# Altium PCB DE-120418.PcbDoc
Units mil, origin at the board's own origin, x right, y up, seen from the top; angles counter-clockwise.
Board outline 690 x 830 mil, 2 copper layers (Top Layer, Bottom Layer); 23 components, 19 nets, 85 pads, 27 vias.
Unrouted connection lines stored in the file: 1.
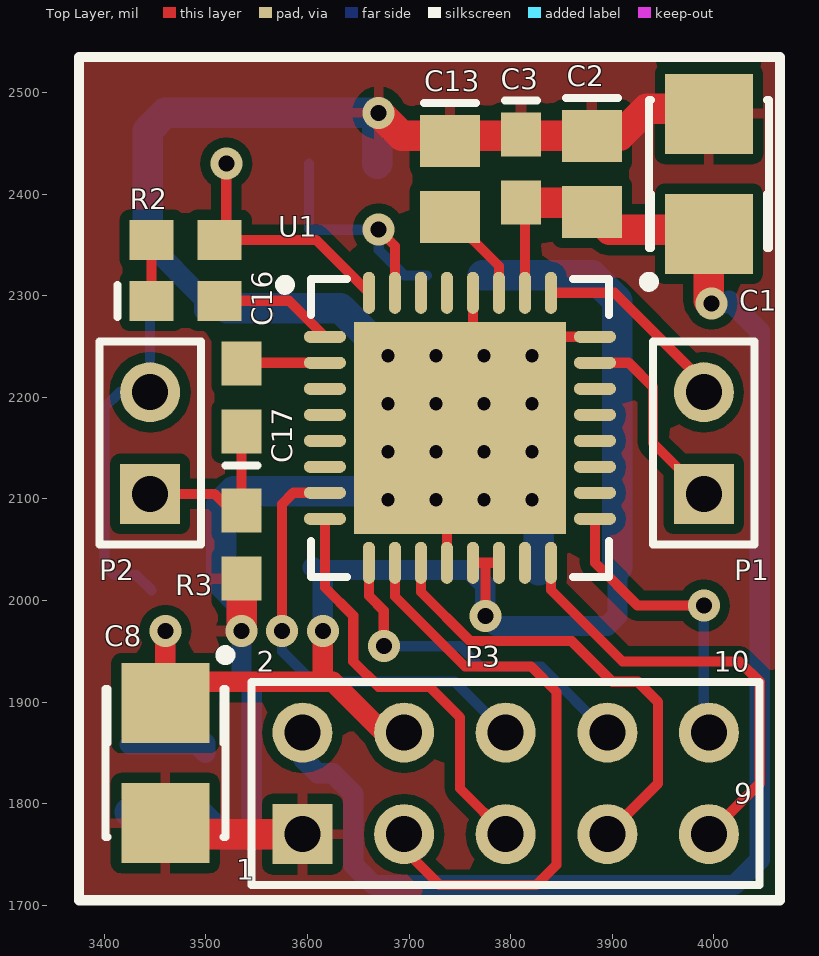
[diagram p0: Top Layer view]
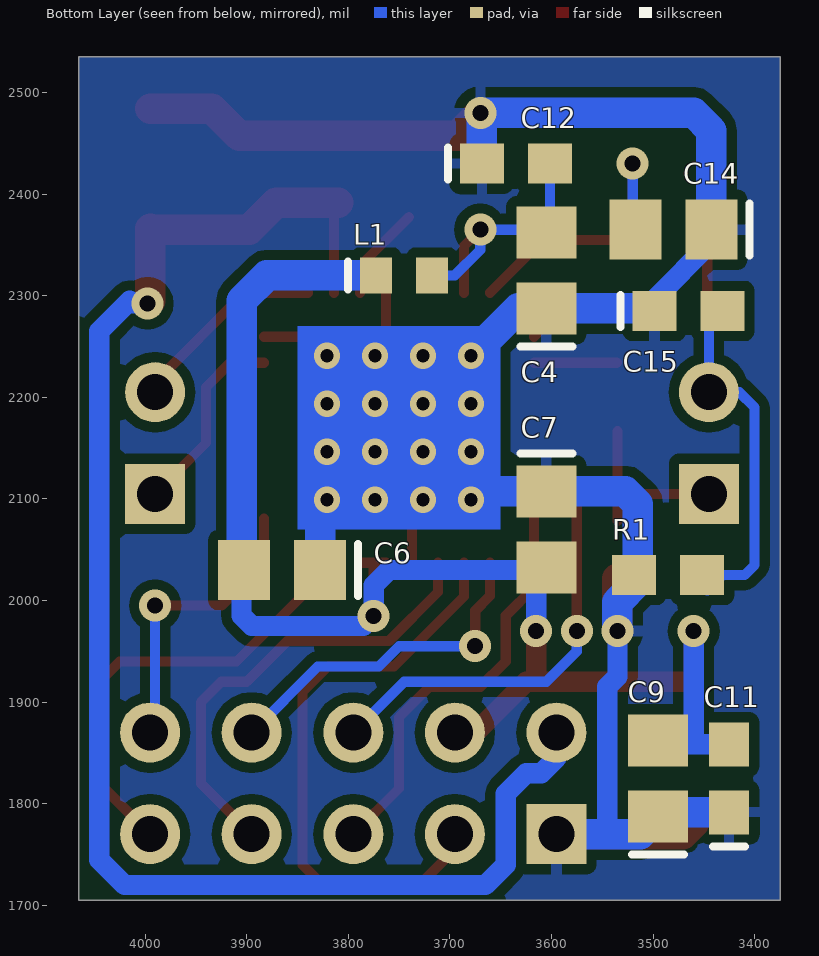
[diagram p1: Bottom Layer view, seen from below]

## Layer stack, top to bottom
Top Solder: solder mask 0.4, Solder Resist, Dk 3.5
Top Layer: signal copper 1.4
Dielectric 1: dielectric 12.6, FR-4, Dk 4.8
Bottom Layer: signal copper 1.4
Bottom Solder: solder mask 0.4, Solder Resist, Dk 3.5

## Board outline
3375,1705 3375,2535 4065,2535 4065,1705

## Design rules (kind name [scope] priority, off if disabled: settings)
Clearance [All] p1: gap=0 except(10: Arc-Fill Arc-Poly Track-Fill Track-Poly SMDPad-Fill SMDPad-Poly THPad-Fill THPad-Poly Via-Fill Via-Poly Fill-Fill Fill-Poly Poly-Poly)
PolygonConnect [All] p1: connectstyle=Relief reliefconductorwidth=10 reliefentries=4 polygonreliefangle="90 Angle" airgapwidth=10
RoutingVias [All] p1: holewidth=15.75 width=31.5 viastyle="Through Hole" minholewidth=5 minwidth=10 maxholewidth=50 maxwidth=100
SolderMaskExpansion [All] p1: expansion=4
Width [All] p1: maxlimit=200 minlimit=10 preferedwidth=30
30 further rules are at their usual default settings.

## Components (designator, comment, footprint, x,y, rotation, side; value= is the part's Value field where it differs from the comment)
C1 "47uF/10V" 3528 3995,2420 r90 top
C2 "10uF" 0805 3880,2420 r270 top
C3 "100nF" 0603 3810,2425 r270 top
C4 "4u7" 0805 3605,2325 r90 bottom
C6 "4u7" 0805 3865,2030 r0 bottom
C7 "4u7" 0805 3605,2070 r270 bottom
C8 "100uF" 3528 3460,1840 r270 top
C9 "10uF" 0805 3495,1825 r90 bottom
C11 "100nF" 0603 3425,1825 r90 bottom
C12 "100nF" 0603 3635,2430 r180 bottom
C13 "4u7" 0805 3740,2415 r270 top
C14 "4u7" 0805 3480,2365 r0 bottom
C15 "220pF" 0603 3465,2285 r180 bottom
C16 "1uF" 0603 3480,2295 r0 top
C17 "1uF" 0603 3535,2200 r90 top
L1 "BLM15AG121" INDC1608L 3745,2320 r180 bottom
P1 "SPEAKER" HDR1X2 3990,2105 r90 top
P2 "MIC" HDR1X2 3445,2105 r90 top
P3 "AUDIO_CODEC" HDR2X5 3595,1770 r0 top
R1 "47K" ERA-0603 3485,2025 r0 bottom
R2 "680R" ERA-0603 3480,2355 r180 top
R3 "0R" ERA-0603 3535,2055 r90 top
U1 "WM8976" QFN32_N 3750,2170 r0 top

## Footprints (in the part's own frame and the unit in brackets; to place one, negate y for a bottom-side part, rotate by r counter-clockwise, add the part's x,y. Pads: shape width x height; smd on the part's side, far side on the other; paste and mask are expansions set on the pad)
0603 [mm] "Chip Capacitor; Body 1.6 x 0.8 mm (LxW typ)"
  rect 1.1x1 smd: 1(-0.85,0) 2(0.85,0)
  silkscreen extent -1.7,-0.4 -1.7,0.4, body extent -1.8,-0.6 1.5,0.6, height 0.87
0805 [mm] "Chip Capacitor; Body 2.0 x 1.2 mm (LxW typ)"
  rect 1.3x1.5 smd: 1(-0.95,0) 2(0.95,0)
  silkscreen extent -1.9,-0.65 -1.9,0.65
3528 [mm] "Capacitor, SM Tantalum; Body 3.5 x 2.8 mm (LxW typ)"
  rect 2x2.2 smd: 1(-1.5,0) 2(1.5,0)
  silkscreen extent -2.82,-1.5 1.85,1.62
ERA-0603 [mm] "Chip Resistor; Body 1.6 x 0.8 mm (LxW typ)"
  rect 1.1x1 smd: 1(-0.85,0) 2(0.85,0)
HDR1X2 [mm] "Connector; Header; 2 Position"
  rect 1.5x1.5 hole 0.9: 1(0,0)
  round 1.5 hole 0.9: 2(2.54,0)
  silkscreen extent -1.27,-1.27 3.81,1.27
HDR2X5 [mm] "Connector; Header; 5x2 Position"
  rect 1.5x1.5 hole 0.9: 1(0,0)
  round 1.5 hole 0.9: 2(0,2.54) 3(2.54,0) 4(2.54,2.54) 5(5.08,0) 6(5.08,2.54) 7(7.62,0) 8(7.62,2.54) 9(10.16,0) 10(10.16,2.54)
  silkscreen extent -1.27,-1.27 11.43,3.81
INDC1608L [mm] "Chip Inductor, Body 1.6x0.8mm, IPC High Density"
  rect 0.8x0.9 smd: 1(-0.7,0) 2(0.7,0)
  silkscreen extent -1.4,-0.35 -1.4,0.35, body extent -0.87,-0.48 0.87,0.48, height 0.55
QFN32_N [mm] "QFN, 32-Leads, Body 7x7 mm, Pitch 0.65mm, IPC Medium Density"
  oval 1.05x0.3 smd: 1(-3.375,2.275) 2(-3.375,1.625) 3(-3.375,0.975) 4(-3.375,0.325) 5(-3.375,-0.325) 6(-3.375,-0.975) 7(-3.375,-1.625) 8(-3.375,-2.275) 17(3.375,-2.275) 18(3.375,-1.625) 19(3.375,-0.975) 20(3.375,-0.325) 21(3.375,0.325) 22(3.375,0.975) 23(3.375,1.625) 24(3.375,2.275)
  oval 0.3x1.05 smd: 9(-2.275,-3.375) 10(-1.625,-3.375) 11(-0.975,-3.375) 12(-0.325,-3.375) 13(0.325,-3.375) 14(0.975,-3.375) 15(1.625,-3.375) 16(2.275,-3.375) 25(2.275,3.375) 26(1.625,3.375) 27(0.975,3.375) 28(0.325,3.375) 29(-0.325,3.375) 30(-0.975,3.375) 31(-1.625,3.375) 32(-2.275,3.375)
  rect 5.3x5.3 smd: 33(0,0)
  silkscreen extent -4.5,-3.72 3.72,3.72, body extent -3.57,-3.57 3.57,3.57, height 1

## Part data
C1 C8: library part 293D156X0004B2, "Tantamount Commercial, Surface Mount Solid Tantalum Chip Capacitor: 15uF, 20% Tolerance, 4 WVDC @ +85°C, Surge = 5.2V"
C2 C4 C6 C7 C9 C13 C14: library part C0805, "Ceramic Chip Capacitor - Standard"
C3 C11 C12 C15 C16 C17: library part C0603, "Ceramic Chip Capacitor - Standard"
L1: library part Inductor_SMD, "Inductor"
P1 P2: library part "Header 2", "Header, 2-Pin"
P3: library part "Header 5X2", "Header, 5-Pin, Dual row"
R1 R2 R3: library part ERAV, "Metal Film Thermosensitive Chip Resistor, 0.56 Ohm to 10k Ohm Range, 5% Tolerance, 0603 Size, 0.063 W"
U1: "Stereo CODEC with speaker driver"

## Via types
v1: diameter 25.98, hole 12.99, Top Layer to Bottom Layer, tented top, 16 vias
v2: diameter 31.5, hole 15.75, Top Layer to Bottom Layer, 11 vias

## Nets (pads, with @x,y where several pads share a name; then routed paths per layer and width w, separated by ;. In a path a pad name is that pad's centre, name@x,y a point inside that pad or via, vN(x,y) a via of type N, cw(c..) or ccw(c..) an arc to the next point about the centre after c; other vN are vias at no path point)
+3V3: C6.2 C7.2 C8.1 C9.2 C11.2 L1.1 P3.4 U1.13 U1.14 | length 1513.9
  Top Layer w10: U1.13 3775.59,2037.13 ; v2(3775,1985) 3775,2036.54 3775.59,2037.13 ; U1.14 3775.59,2037.13
  Top Layer w20: v2(3460,1970) 3460,1920 3615,1920 ; v2(3615,1970) 3615,1920 ; P3.4 3675,1870 3625,1920 3615,1920
  Bottom Layer w20: C11.2 3455,1858.46 ; v2(3460,1970) 3460,1863.46 3455,1858.46 ; C9.2@3491.06,1871.06 C9.2@3491.06,1858.46 ; C9.2@3499.53,1859.53 3499.53,1850 C9.2@3491.06,1858.46 ; C7.2 C7.2@3615,2022.6 ; v2(3615,1970) 3615,2030 3760,2030 3775,2015 v2(3775,1985) 3785,1975 3895,1975 3905,1985 C6.2@3905,2032.6 ; P3.4@3690,1870 P3.4 ; 3455,1858.46 C9.2@3491.06,1858.46
  Bottom Layer w30: L1.1 3880,2320 3905,2295 C6.2@3905,2032.6
+5V: C1.1 C2.2 C3.2 P3.2 U1.26 | length 1527
  Top Layer w10: C3.2 3813.98,2387.56 U1.26
  Top Layer w30: C3.2 3871.06,2391.54 C2.2 3897.6,2365 3990,2365 C1.1@3995,2360 ; C1.1@3995,2365.94 C1.1@3995,2360 ; v2(3997.5,2292.5) 3995,2295 C1.1@3995,2360
  Bottom Layer w20: P3.2@3600,1870 P3.2 3595,1845 3610,1830 3625,1830 3645,1810 3645,1740 3665,1720 4020,1720 4045,1745 4045,2265 4015,2295 4012.5,2292.5 v2(3997.5,2292.5)
I2C4_SCL: P3.9 U1.16 | length 460.3
  Top Layer w10: U1.16 3839.57,2010.43 3910,1940 4025,1940 4045,1920 4045,1820 P3.9 P3.9@3995,1790
I2C4_SDA: P3.10 U1.17 | length 287.9
  Top Layer w10: U1.17 3882.87,2037.13 3925,1995 v2(3990,1995)
  Bottom Layer w10: P3.10@3990,1875 v2(3990,1995)
MIC_BIAS: C14.2 R2.1 U1.32 | length 315.7
  Top Layer w10: v2(3520,2430) 3520,2366.54 3508.46,2355 3608.31,2355 U1.32
  Bottom Layer w10: C14.2@3520,2367.6 v2(3520,2430)
NetC4_2: C4.2 C12.2 L1.2 U1.31 | length 281.7
  Top Layer w10: v2(3670,2365) 3686.02,2348.98 U1.31
  Bottom Layer w10: C12.2 3601.54,2365.87 C4.2 3607.6,2365 v2(3670,2365) 3670,2345 3695,2320 L1.2
NetC13_2: C13.2 U1.27 | length 94.8
  Top Layer w10: C13.2 3788.39,2329.21 U1.27
NetC15_2: C15.2 C16.1 P2.2 R1.1 R2.2 | length 406.6
  Top Layer w10: C16.1 R2.2@3446.54,2350
  Bottom Layer w10: C15.2@3445,2293.46 P2.2 3415,2205 3400,2190 3400,2035 3410,2025 3431.54,2025 R1.1@3446.54,2010
NetC16_2: C16.2 U1.1 | length 118.3
  Top Layer w10: C16.2 3581.69,2295 U1.1
NetC17_1: C17.1 P2.1 R3.2 | length 189.1
  Top Layer w10: P2.1 3508.46,2105 3535,2078.46 C17.1
NetC17_2: C17.2 U1.2 | length 81.6
  Top Layer w10: C17.2@3535.51,2233.98 U1.2
NetP1_1: P1.1 U1.23 | length 192.8
  Top Layer w10: U1.23 3916.02,2233.98 3940,2210 3940,2155 P1.1
NetP1_2: P1.2 U1.25 | length 196.8
  Top Layer w10: U1.25 3902.13,2302.87 3990,2215 P1.2
SAI2_FSB: P3.6 U1.7 | length 449.8
  Top Layer w10: v2@3575,1965 v2(3575,1970) 3575,2095 3586.02,2106.02 U1.7
  Bottom Layer w10: v2(3575,1970) 3575,1950 3605,1920 3745,1920 P3.6
SAI2_MCLKB: P3.7 U1.11 | length 457.7
  Top Layer w10: U1.11 3711.61,2008.39 3760,1960 3860,1960 3900,1920 3925,1920 3945,1900 3945,1820 P3.7
SAI2_SCKB: P3.5 U1.8 | length 413.4
  Top Layer w10: U1.8 3617.13,2012.87 3645,1985 3645,1940 3670,1915 3720,1915 3750,1885 3750,1815 P3.5
SAI2_SDA: P3.8 U1.9 | length 359
  Top Layer w10: U1.9@3660,2036.69 U1.9 3660.43,2004.57 3675,1990 v2(3675,1955) ; P3.8@3895,1855 P3.8
  Bottom Layer w10: v2(3675,1955) 3750,1955 3770,1935 3830,1935 P3.8
SAI2_SDB: P3.3 U1.10 | length 573.8
  Top Layer w10: U1.10 3686.02,2003.98 3755,1935 3820,1935 3845,1910 3845,1740 3825,1720 3730,1720 P3.3@3695,1755
VSS: C1.2 C2.1 C3.1 C4.1 C6.1 C7.1 C8.2 C9.1 C11.1 C12.1 C13.1 C14.1 C15.1 P3.1 R1.2 R3.1 U1.12 U1.24 U1.28 U1.33 | length 2389.7
  Top Layer w10: U1.12 3737.2,2157.2 U1.33 3839.57,2259.57 U1.24 ; U1.33@3762.8,2193.62 U1.28
  Top Layer w30: C8.2 3470.94,1770 P3.1 ; v2(3535,1970) R3.1 ; v2(3670,2480) 3692.6,2457.4 C2.1 3907.4,2457.4 3934.06,2484.06 C1.2@3995,2484.06
  Bottom Layer w10: C15.1@3512.6,2295 3513.46,2295 3520.87,2287.6
  Bottom Layer w20: C14.1 3442.6,2352.4 3498.46,2296.54 C15.1 ; v2(3535,1970) 3535,1925 3545,1915 3545,1775 3540,1770
  Bottom Layer w30: C11.1 3491.06,1791.54 C9.1 3512.6,1770 3540,1770 P3.1 ; C14.1 3442.6,2462.6 3460,2480 v2(3670,2480) ; 3520.87,2287.6 C4.1 3632.4,2287.6 v1(3679.13,2240.87) ; v2(3535,1970) 3535,1998.46 3515,2018.46 3515,2095 3527.4,2107.4 C7.1 3670.87,2107.4 v1(3679.13,2099.13) ; C12.1 v2@3668.46,2478.46 ; v1(3820.87,2099.13) 3827.6,2092.4 C6.1
  other v1: 3726.38,2099.13 3773.62,2099.13 3679.13,2146.38 3726.38,2146.38 3773.62,2146.38 3820.87,2146.38 3679.13,2193.62 3726.38,2193.62 3773.62,2193.62 3820.87,2193.62 3726.38,2240.87 3773.62,2240.87 3820.87,2240.87
pads on no net: U1.3 U1.4 U1.5 U1.6 U1.15 U1.18 U1.19 U1.20 U1.21 U1.22 U1.29 U1.30

## Polygon pours and split planes (outlines as drawn)
VSS on Bottom Layer "Bottom Layer-No Net" (solid, remove dead copper, pour order 0): 3375,2535 4065,2535 4065,1705 3375,1705 3375,2535
VSS on Top Layer "Bottom Layer-No Net" (solid, remove dead copper, pour order 2): 3375,2535 4065,2535 4065,1705 3375,1705 3375,2535

## Other copper
Bottom Layer:
  rectangle net VSS: 3650,2070 3850,2270

## Silkscreen, mask and mechanical layers (free items; w line width, h text height)
Top Overlay:
  the board outline again, w10

## Text inside footprints (layer, text, board x,y; h text height)
P3: Top Overlay "10" at 4000,1930 h20; Top Overlay "9" at 4020,1800 h20; Top Overlay "1" at 3530,1725 h20; Top Overlay "2" at 3550,1930 h20